# Altium PCB senkron_buck.PcbDoc (part 2 of 3)
Units mm, origin at the board's own origin, x right, y up, seen from the top; angles counter-clockwise.
Board outline 100 x 70 mm, 4 copper layers (Top Layer, L2_GND, L3_PWR, Bottom Layer), stack 1.586 mm thick; 52 components, 27 nets, 143 pads, 815 vias.
Unrouted connection lines stored in the file: 34.
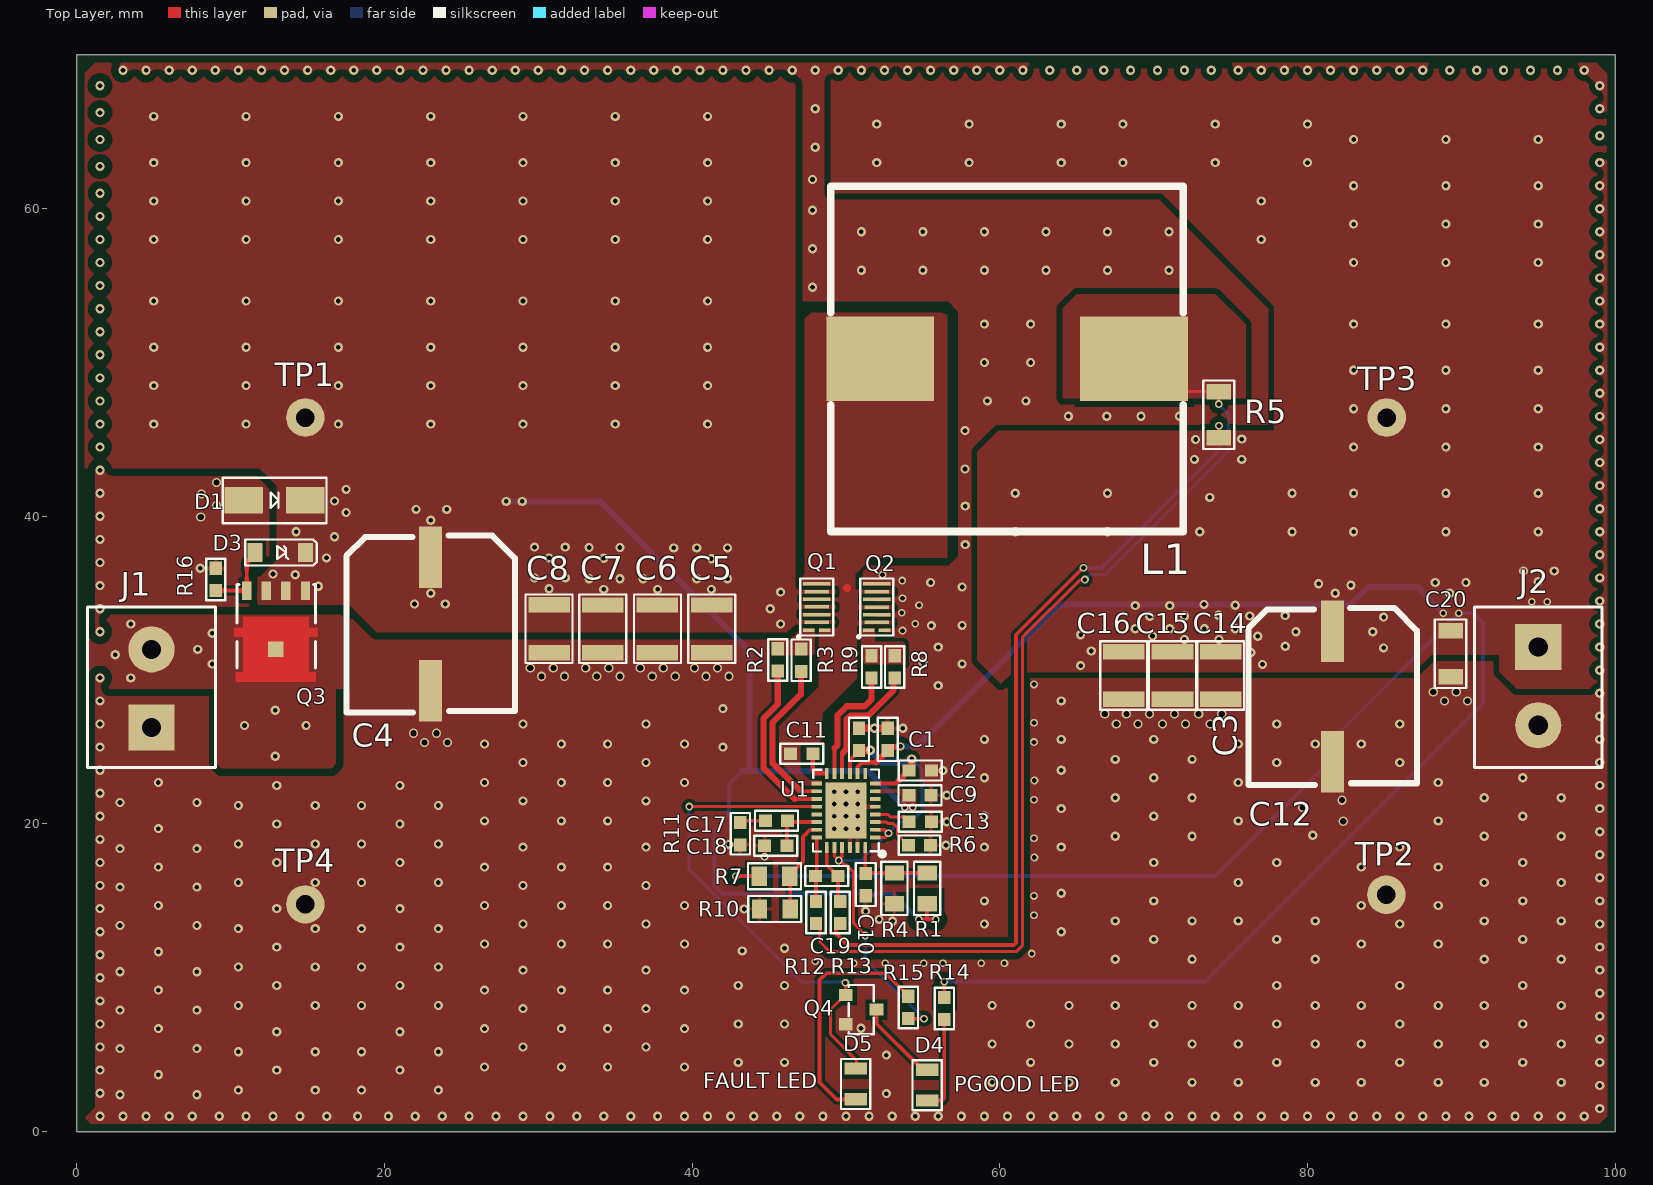
[diagram p0: Top Layer view]

## Part data (continued)
C20: library part "Cap Cer 10uF %10 SMD 1206 (25V)", "Ceramic Capacitor, Multilayer, Ceramic, 25V, 10% +Tol, 10% -Tol, X7R, +-15% TC, 10uF, Surface Mount, 1206 inch", Case Code (Metric)=3216, Case Code (Imperial)=1206, Dielectric=X7R, Dielectric Material=Ceramic, Manufacturer="Samsung Electro-Mechanics", Manufacturer Part Number=CL31B106KAHNNNE, Max Operating Temperature=125°C, Min Operating Temperature=-55°C, Supplier Part Number=187-CL31B106KAHNNNE, Tolerance=10%, Voltage=25V, Case/Package=1206, Category="Ceramic Capacitors", China RoHS=Compliant, ComponentLink1Description=https://datasheet.octopart.com:443/CL31B106KAHNNNE-Samsung-Electro-Mechanics-datasheet-182024324.pdf?src-supplier=IHS, ComponentLink1URL=https://datasheet.octopart.com:443/CL31B106KAHNNNE-Samsung-Electro-Mechanics-datasheet-182024324.pdf?src-supplier=IHS, ComponentLink2Description=https://datasheet.octopart.com:443/CL31B106KAHNNNE-Samsung-Electro-Mechanics-datasheet-136482614.pdf?src-supplier=Samsung+SCT, ComponentLink2URL=https://datasheet.octopart.com:443/CL31B106KAHNNNE-Samsung-Electro-Mechanics-datasheet-136482614.pdf?src-supplier=Samsung+SCT, ComponentLink3Description=https://datasheet.octopart.com:443/CL31B106KAHNNNE-Samsung-Electro-Mechanics-datasheet-11609088.pdf?src-supplier=Future+Electronics, ComponentLink3URL=https://datasheet.octopart.com:443/CL31B106KAHNNNE-Samsung-Electro-Mechanics-datasheet-11609088.pdf?src-supplier=Future+Electronics, ComponentLink4Description=https://datasheet.octopart.com:443/CL31B106KAHNNNE-Samsung-Electro-Mechanics-datasheet-149066873.pdf?src-supplier=Future+Electronics, ComponentLink4URL=https://datasheet.octopart.com:443/CL31B106KAHNNNE-Samsung-Electro-Mechanics-datasheet-149066873.pdf?src-supplier=Future+Electronics, ComponentLink5Description=https://datasheet.octopart.com:443/CL31B106KAHNNNE-Samsung-Electro-Mechanics-datasheet-116051334.pdf?src-supplier=Future+Electronics, ComponentLink5URL=https://datasheet.octopart.com:443/CL31B106KAHNNNE-Samsung-Electro-Mechanics-datasheet-116051334.pdf?src-supplier=Future+Electronics, ComponentLink6Description=https://datasheet.octopart.com:443/CL31B106KAHNNNE-Samsung-Electro-Mechanics-datasheet-81462475.pdf?src-supplier=Future+Electronics, ComponentLink6URL=https://datasheet.octopart.com:443/CL31B106KAHNNNE-Samsung-Electro-Mechanics-datasheet-81462475.pdf?src-supplier=Future+Electronics, ComponentLink7Description=https://datasheet.octopart.com:443/CL31B106KAHNNNE-Samsung-datasheet-42485257.pdf?src-supplier=Future+Electronics, ComponentLink7URL=https://datasheet.octopart.com:443/CL31B106KAHNNNE-Samsung-datasheet-42485257.pdf?src-supplier=Future+Electronics, ComponentLink8Description=https://datasheet.octopart.com/CL31B106KAHNNNE-Samsung-Electro-Mechanics-datasheet-8324245.pdf, ComponentLink8URL=https://datasheet.octopart.com/CL31B106KAHNNNE-Samsung-Electro-Mechanics-datasheet-8324245.pdf, ComponentLink9Description=https://datasheet.octopart.com/CL31B106KAHNNNE-Samsung-Electro-Mechanics-datasheet-97040617.pdf, ComponentLink9URL=https://datasheet.octopart.com/CL31B106KAHNNNE-Samsung-Electro-Mechanics-datasheet-97040617.pdf, ComponentLink10Description=https://datasheet.octopart.com/General-Multilayer-Ceramic-Capacitors-Samsung-datasheet-family-111.pdf, ComponentLink10URL=https://datasheet.octopart.com/General-Multilayer-Ceramic-Capacitors-Samsung-datasheet-family-111.pdf, ComponentLink11Description=https://datasheet.octopart.com:443/CL31B106KAHNNNE-Samsung-datasheet-59220082.pdf?src-supplier=TME, ComponentLink11URL=https://datasheet.octopart.com:443/CL31B106KAHNNNE-Samsung-datasheet-59220082.pdf?src-supplier=TME, ComponentLink12Description=http://sigma.octopart.com:80/rohs_certificate/General-Multilayer-Ceramic-Capacitors-Samsung-family-110.pdf?src-supplier=Compliance+Statements, ComponentLink12URL=http://sigma.octopart.com:80/rohs_certificate/General-Multilayer-Ceramic-Capacitors-Samsung-family-110.pdf?src-supplier=Compliance+Statements, ComponentLink13Description=http://sigma.octopart.com:80/rohs_statement/General-Multilayer-Ceramic-Capacitors-Samsung-family-132.pdf?src-supplier=Compliance+Statements, ComponentLink13URL=http://sigma.octopart.com:80/rohs_statement/General-Multilayer-Ceramic-Capacitors-Samsung-family-132.pdf?src-supplier=Compliance+Statements, ComponentLink14Description=http://sigma.octopart.com:80/reach_statement/General-Multilayer-Ceramic-Capacitors-Samsung-family-133.pdf?src-supplier=Compliance+Statements, ComponentLink14URL=http://sigma.octopart.com:80/reach_statement/General-Multilayer-Ceramic-Capacitors-Samsung-family-133.pdf?src-supplier=Compliance+Statements, ComponentLink15Description=Tedarikçi, ComponentLink15URL=https://www.ozdisan.com/p/smt-smd-ve-mlcc-kapasitorler-184/samsung-cl31b106kahnnne-35896, Depth=1.6mm, Height=1.8mm, Length=3.2mm, Lifecycle Status=Production, Material=Ceramic, Mounting Technology="Surface Mount", Number of Terminals=2, Pricing="1=0,1, 10=0,036, 50=0,036, 100=0,036, 1000=0,036, 10000=0,035 (USD)", Radiation Hardening=No, REACH SVHC=Yes, RoHS=Compliant, Schedule B="8532240020, 8532240020|8532240020|8532240020|8532240020|8532240020", Stock=482438, Supplier=Mouser, Thickness=1.8034mm, Voltage Rating=25V, Voltage Rating (DC)=25V, Width=1.6mm
D1: library part "DIODE TVS 400W 40V DO214AC SMA", "DO-214AC SMA SMAJ 1 Surface Mount Zener Tvs Diode 44.4V 5muA 400W -55C~150C TJ", Breakdown Voltage=46.75V, Case/Package=SMA, Clamping Voltage=64.5V, Forward Voltage=3.5V, Leakage Current=5µA, Manufacturer=HOTTECH, Max Breakdown Voltage=49.1V, Max Junction Temperature (Tj)=150°C, Max Power Dissipation=1W, Max Surge Current=40A, Min Breakdown Voltage=44.4V, Min Operating Temperature=-55°C, Peak Pulse Current=31A, Peak Pulse Power=400W, Power Line Protection=No, Reverse Standoff Voltage=40V, Supplier Part Number=652-SMAJ40A, Test Current=1mA, Category="TVS Diodes", China RoHS=Non-Compliant, ComponentLink1Description=https://datasheet.octopart.com:443/SMAJ40A-Bourns-datasheet-178218646.pdf?src-supplier=TME, ComponentLink1URL=https://datasheet.octopart.com:443/SMAJ40A-Bourns-datasheet-178218646.pdf?src-supplier=TME, ComponentLink2Description=https://datasheet.octopart.com:443/SMAJ40A-Bourns-datasheet-112042111.pdf?src-supplier=Newark, ComponentLink2URL=https://datasheet.octopart.com:443/SMAJ40A-Bourns-datasheet-112042111.pdf?src-supplier=Newark, ComponentLink3Description=https://datasheet.octopart.com:443/SMAJ40A-Bourns-datasheet-42429164.pdf?src-supplier=Newark, ComponentLink3URL=https://datasheet.octopart.com:443/SMAJ40A-Bourns-datasheet-42429164.pdf?src-supplier=Newark, ComponentLink4Description=https://datasheet.octopart.com:443/SMAJ40A-Bourns-datasheet-182247548.pdf?src-supplier=IHS, ComponentLink4URL=https://datasheet.octopart.com:443/SMAJ40A-Bourns-datasheet-182247548.pdf?src-supplier=IHS, ComponentLink5Description=https://datasheet.octopart.com:443/SMAJ40A-Bourns-datasheet-13385887.pdf?src-supplier=Electro+Sonic, ComponentLink5URL=https://datasheet.octopart.com:443/SMAJ40A-Bourns-datasheet-13385887.pdf?src-supplier=Electro+Sonic, ComponentLink6Description=https://datasheet.octopart.com:443/SMAJ40A-Bourns-datasheet-154729895.pdf?src-supplier=Electro+Sonic, ComponentLink6URL=https://datasheet.octopart.com:443/SMAJ40A-Bourns-datasheet-154729895.pdf?src-supplier=Electro+Sonic, ComponentLink7Description=https://datasheet.octopart.com:443/SMAJ40A-Bourns-datasheet-154729573.pdf?src-supplier=RS+(Formerly+Allied+Electronics), ComponentLink7URL=https://datasheet.octopart.com:443/SMAJ40A-Bourns-datasheet-154729573.pdf?src-supplier=RS+(Formerly+Allied+Electronics), ComponentLink8Description=https://datasheet.octopart.com:443/SMAJ40A-Bourns-datasheet-14047643.pdf?src-supplier=iiiC, ComponentLink8URL=https://datasheet.octopart.com:443/SMAJ40A-Bourns-datasheet-14047643.pdf?src-supplier=iiiC, ComponentLink9Description=http://sigma.octopart.com:80/conflict_mineral_statement/Bourns-company-36.pdf?src-supplier=Compliance+Statements, ComponentLink9URL=http://sigma.octopart.com:80/conflict_mineral_statement/Bourns-company-36.pdf?src-supplier=Compliance+Statements, ComponentLink10Description=Tedarikçi, ComponentLink10URL=https://www.ozdisan.com/p/tvs-diyotlar-386/hottech-smaj40a-ht-512674, Composition=Zener, Direction=Unidirectional, Element Configuration=Single, Height=2.29mm, Lifecycle Status=Production, Manufacturer Part Number=SMAJ40A-HT, Max Operating Temperature=150°C, Max Reverse Leakage Current=5µA, Mounting Technology="Surface Mount", Number of Channels=1, Number of Elements=1, Number of Terminals=2, Number of Unidirectional Channels=1, Operating Supply Voltage=3.5V, Peak Reverse Current=5µA, Pins=2, Polarity=Unidirectional, Pricing="1=0,37, 10=0,158, 50=0,158, 100=0,099, 1000=0,095, 10000=0,079 (USD)", Radiation Hardening=No, REACH SVHC=No, Reverse Breakdown Voltage=44.4V, RoHS=Compliant, Schedule B=8541100080, Stock=74885, Supplier=Mouser, Termination=SMD/SMT
D3: "DIODE ZENER 500mW 15V ±5% SOD123 SMT", Voltaj - Zener (Nom) (Vz)="15 V15 V", ComponentLink1Description=Tedarikçi, ComponentLink1URL=https://www.ozdisan.com/p/zener-diyotlar-390/hottech-mmsz15v-ht-465503, Güç (Max)=500mW, Kılıf / Kasa=SOD123, Montaj Tipi=SMT, Ters Akım="45 nA"
D4: library part "LED GREEN 0805", "Single Color LED, Brilliant Yellow Green, Water Clear, 1.4mm", Forward Current=25mA, Forward Voltage=2.35V, Manufacturer=Everlight, Manufacturer Part Number=17-21/G6C-FM1N2B/4T, Max Operating Temperature=85°C, Min Operating Temperature=-40°C, Reverse Voltage=5V, Supplier Part Number=2187640, Category=LEDs, ComponentLink1Description=https://datasheet.octopart.com:443/17-21-G6C-FM1N2B-4T-Everlight-datasheet-182278283.pdf?src-supplier=IHS, ComponentLink1URL=https://datasheet.octopart.com:443/17-21-G6C-FM1N2B-4T-Everlight-datasheet-182278283.pdf?src-supplier=IHS, ComponentLink2Description=Tedarikçi, ComponentLink2URL=https://www.ozdisan.com/p/sinyal-ledler-tek-renkli-361/everlight-17-21-g6c-fm1n2b-4t-745079, Height=1.1mm, Lifecycle Status=Production, Luminous Intensity=18mcd, Mounting Technology="Surface Mount", Number of Circuits=1, Number of Terminals=2, Peak Wavelength=575nm, Pricing="4000=0,0235, 12000=0,023, 20000=0,0227, 80000=0,0221, 120000=0,0216 (USD)", REACH SVHC=Yes, RoHS=Compliant, Shape=Rectangular, Supplier="Future Electronics", Terminal Pitch=1.6mm, Viewing Angle=140°
D5: library part "LED RED 0805", "Single Color LED, Brilliant Red, Water Clear, 1.4mm", Forward Current=25mA, Forward Voltage=2.3V, Manufacturer=Everlight, Manufacturer Part Number=17-21/R6C-AP1Q2L/4T, Max Operating Temperature=85°C, Min Operating Temperature=-40°C, Reverse Voltage=5V, Supplier Part Number=3156045, Category=LEDs, ComponentLink1Description=https://datasheet.octopart.com:443/17-21-R6C-AP1Q2L-4T-Everlight-datasheet-116384818.pdf?src-supplier=IHS, ComponentLink1URL=https://datasheet.octopart.com:443/17-21-R6C-AP1Q2L-4T-Everlight-datasheet-116384818.pdf?src-supplier=IHS, ComponentLink2Description=Tedarikçi, ComponentLink2URL=https://www.ozdisan.com/p/sinyal-ledler-tek-renkli-361/everlight-17-21-r6c-ap1q2l-4t-752951, Height=1mm, Lifecycle Status=Production, Luminous Intensity=45mcd, Mounting Technology="Surface Mount", Number of Circuits=1, Number of Terminals=2, Peak Wavelength=632nm, Pricing="4000=0,0312, 12000=0,0305, 20000=0,0301, 60000=0,0294, 100000=0,0288 (USD)", REACH SVHC=Yes, RoHS=Compliant, Shape=Rectangular, Supplier="Future Electronics", Viewing Angle=140°
J1 J2: library part "2P Screw Terminal Block", "Barrier Strip Terminal Block, 13.5A, 1.5mm2, 1 Row(s), 1 Deck(s)", Current Rating=13.5A, Manufacturer="Phoenix Contact", Manufacturer Part Number=1729128, Supplier Part Number=277-1247-ND, Voltage Rating=400V, Category="Terminal Blocks", ComponentLink1Description=https://datasheet.ciiva.com/16046/1729128-16046181.pdf?src-supplier=Onlinecomponents.com, ComponentLink1URL=https://datasheet.ciiva.com/16046/1729128-16046181.pdf?src-supplier=Onlinecomponents.com, ComponentLink2Description=https://datasheet.ciiva.com/15169/getdatasheetpartid-199310-15169845.pdf?src-supplier=Verical, ComponentLink2URL=https://datasheet.ciiva.com/15169/getdatasheetpartid-199310-15169845.pdf?src-supplier=Verical, ComponentLink3Description=https://datasheet.ciiva.com/823/1729128-823779.pdf?src-supplier=Digikey, ComponentLink3URL=https://datasheet.ciiva.com/823/1729128-823779.pdf?src-supplier=Digikey, ComponentLink4Description=https://datasheet.ciiva.com/14607/70054405-14607157.pdf?src-supplier=Allied+Electronics, ComponentLink4URL=https://datasheet.ciiva.com/14607/70054405-14607157.pdf?src-supplier=Allied+Electronics, ComponentLink5Description=https://datasheet.ciiva.com/29218/743664-da-01-en-printklemmenblock-mkdsn-1-5-2-5-08-29218154.pdf?src-supplier=Conrad, ComponentLink5URL=https://datasheet.ciiva.com/29218/743664-da-01-en-printklemmenblock-mkdsn-1-5-2-5-08-29218154.pdf?src-supplier=Conrad, ComponentLink6Description=https://datasheet.ciiva.com:443/pdfs/VipMasterIC/IC/ONST/ONST-S-A0002844216/ONST-S-A0002844216-1.pdf?src-supplier=IHS+Markit, ComponentLink6URL=https://datasheet.ciiva.com:443/pdfs/VipMasterIC/IC/ONST/ONST-S-A0002844216/ONST-S-A0002844216-1.pdf?src-supplier=IHS+Markit, ComponentLink7Description=https://datasheet.ciiva.com/825/osttcxx0162-825113.pdf?src-supplier=Digikey, ComponentLink7URL=https://datasheet.ciiva.com/825/osttcxx0162-825113.pdf?src-supplier=Digikey, ComponentLink8Description=https://datasheet.ciiva.com:443/pdfs/VipMasterIC/IC/PCON/PCON-S-A0008047989/PCON-S-A0008036843-1.pdf?src-supplier=IHS+Markit, ComponentLink8URL=https://datasheet.ciiva.com:443/pdfs/VipMasterIC/IC/PCON/PCON-S-A0008047989/PCON-S-A0008036843-1.pdf?src-supplier=IHS+Markit, Fastening Method=SCREW, Mounting Technology=Board, Number of Decks=1, Number of Rows=1, Number of Ways=2, Pricing="1=1,2, 10=1,104, 50=1,058, 100=1,012, 250=0,9844, 500=0,92, 1000=0,8464, 2500=0,782, 5000=0,7475 (USD)", Reach SVHC Compliant=No, RoHS=Yes, RoHS Compliant=Yes, Safety Approval=CSA,CUL,CB,EAC, Stock=25195, Supplier=Digikey, Terminal and Terminal Block Type="BARRIER STRIP TERMINAL BLOCK", Wire Cross Section=1.5mm2, Wire/Cable Gauge=16AWG
L1: library part "Inductor 10uH %20 SMD NONSTANDART 3.4mOhm", "WE-HCI SMT Flat Wire High Current Inductor", Ambient Temperature Range High=75°C, Ambient Temperature Range Low=-40°C, DC Resistance (DCR)=3.4mΩ, Manufacturer="Wurth Elektronik", Manufacturer Part Number=74435581000, Max Operating Temperature=125°C, Saturation Current=8A, Self Resonant Frequency=15MHz, Supplier Part Number=710-74435581000, Inductance Tolerance=20%, Category="Fixed Inductors", ComponentLink1Description=Tedarikçi, ComponentLink1URL=https://www.e-komponent.com/10-uh-shielded-drum-core-wirewound-inductor-74435581000, ComponentLink2Description=https://datasheet.octopart.com:443/74435581000-Wurth-Elektronik-datasheet-168489601.pdf?src-supplier=Wurth+Elektronik, ComponentLink2URL=https://datasheet.octopart.com:443/74435581000-Wurth-Elektronik-datasheet-168489601.pdf?src-supplier=Wurth+Elektronik, ComponentLink3Description=https://datasheet.octopart.com:443/74435581000-W%C3%BCrth-Elektronik-datasheet-141435431.pdf?src-supplier=Newark, ComponentLink3URL=https://datasheet.octopart.com:443/74435581000-W%C3%BCrth-Elektronik-datasheet-141435431.pdf?src-supplier=Newark, ComponentLink4Description=https://datasheet.octopart.com:443/74435581000-W%C3%BCrth-Elektronik-datasheet-12562517.pdf?src-supplier=Newark, ComponentLink4URL=https://datasheet.octopart.com:443/74435581000-W%C3%BCrth-Elektronik-datasheet-12562517.pdf?src-supplier=Newark, ComponentLink5Description=https://datasheet.octopart.com:443/74435581000-W%C3%BCrth-Elektronik-datasheet-112299786.pdf?src-supplier=Newark, ComponentLink5URL=https://datasheet.octopart.com:443/74435581000-W%C3%BCrth-Elektronik-datasheet-112299786.pdf?src-supplier=Newark, Height=12mm, Length=22.5mm, Min Operating Temperature=-40°C, Pins=2, Pricing="1=7,34, 10=7,2, 50=6,37, 100=6,37, 1000=4,99, 10000=4,99 (USD)", RoHS=Compliant, Stock=497, Supplier=Mouser, Width=22mm
Q1 Q2: "N-Channel 100 V 60A (Ta) Surface Mount Die", ComponentLink1Description=Tedarikçi, ComponentLink1URL=https://www.e-komponent.com/epc2218-epc-transistor-fet-mosfet-tekli, ComponentLink2Description=Datasheet, ComponentLink2URL=https://epc-co.com/epc/Portals/0/epc/documents/datasheets/EPC2218_datasheet.pdf?ver=C-R46UeqE-iEjg6gr7hUEg%3d%3d, Drain Source Gerilimi (Vdss)="100 V", FET Tipi=N-Channel, Maksimum Açık Drain Source direnci - (Maks) @ Id, Vgs="3.2mOhm @ 25A, 5V", Maksimum Gain Source Gerilimi="+6V, -4V", Maksimum Giriş Kapasitansı (Ciss) @ Vds="2703 pF @ 50 V", Maksimum Kapı Şarjı (Qg) @ Vgs="16.3 nC @ 5 V", Maksimum Sürüş Gerilimi=5V, Montaj Tipi="Surface Mount", Paket / Kılıf=Die, Sürekli Drain Akımı (Id) @ 25°C="60A (Ta)", Teknoloji="GaNFET (Gallium Nitride)", Vgs(th) (Maks) @ Id="2.5V @ 7mA", Çalışma Sıcaklığı="-40°C ~ 150°C (TJ)"
Q3: library part SQJ459EP-T1_GE3, "SQJ459EP Series -60 V 0.024 Ohm Automotive P-Channel Mosfet - PowerPAK SO-8L", Continuous Drain Current (ID)=52A, Drain to Source Breakdown Voltage=-60V, Drain to Source Resistance=18mΩ, Gate to Source Voltage (Vgs)=20V, Manufacturer=Vishay, Max Junction Temperature (Tj)=175°C, Min Breakdown Voltage=60V, Min Operating Temperature=-55°C, Power Dissipation=83W, Supplier Part Number=78-SQJ459EP-T1_GE3, Category=MOSFETs, ComponentLink1Description=https://datasheet.octopart.com:443/SQJ459EP-T1_GE3-Vishay-datasheet-181474805.pdf?src-supplier=IHS, ComponentLink1URL=https://datasheet.octopart.com:443/SQJ459EP-T1_GE3-Vishay-datasheet-181474805.pdf?src-supplier=IHS, ComponentLink2Description=https://datasheet.octopart.com:443/SQJ459EP-T1_GE3-Vishay-datasheet-138899039.pdf?src-supplier=Upverter, ComponentLink2URL=https://datasheet.octopart.com:443/SQJ459EP-T1_GE3-Vishay-datasheet-138899039.pdf?src-supplier=Upverter, ComponentLink3Description=https://datasheet.octopart.com:443/SQJ459EP-T1_GE3-Vishay-datasheet-137754848.pdf?src-supplier=Future+Electronics, ComponentLink3URL=https://datasheet.octopart.com:443/SQJ459EP-T1_GE3-Vishay-datasheet-137754848.pdf?src-supplier=Future+Electronics, ComponentLink4Description=http://sigma.octopart.com:80/rohs_statement/Vishay-company-15.pdf?src-supplier=Compliance+Statements, ComponentLink4URL=http://sigma.octopart.com:80/rohs_statement/Vishay-company-15.pdf?src-supplier=Compliance+Statements, Drain to Source Voltage (Vdss)=-60V, Height=1.267mm, Lifecycle Status=Production, Manufacturer Part Number=SQJ459EP-T1_GE3, Max Operating Temperature=175°C, Number of Channels=1, Number of Elements=1, Number of Terminals=4, Pricing="1=1,67, 10=1,26, 50=1,26, 100=0,864, 1000=0,633, 10000=0,526 (USD)", RoHS=Compliant, Schedule B="8541290080, 8541290080|8541290080|8541290080|8541290080|8541290080", Stock=10269, Supplier=Mouser, Turn-Off Delay Time=88ns, Turn-On Delay Time=12ns
Q4: "MOSFET DIS.6.5A 20V N-CH SOT23 SMT", Manufacturer="Pan Jit", Supplier Part Number=241-PJA3416AER100001, Category=MOSFETs, ComponentLink1Description=Datasheet, ComponentLink1URL=https://cdn.ozdisan.com/ETicaret_Dosya/601491_131509.pdf, ComponentLink2Description=Supplier, ComponentLink2URL=https://ozdisan.com/guc-yari-iletkenleri/mosfetler/discrete-mosfetler/PJA3416AER100001/601492, Designed by=Eren/Mehmet, Manufacturer Part Number=PJA3416AE_R1_00001, Pricing="1=0,29, 10=0,195, 50=0,195, 100=0,101, 1000=0,101, 10000=0,062 (USD)", RoHS=No, Stock=7147, Supplier=Mouser
R1: library part "RES 412k Ohm %1 SMD 0805", "RES.(2012) 0805 412K Ohms 1% 1/8W-S 100PPM", Manufacturer="Royal Ohm", Manufacturer Part Number=0805S8F4123T5E, Supplier Part Number=303-0805S8F4123T5E, Category=Uncategorized, ComponentLink1Description=Tedarikçi, ComponentLink1URL=https://www.ozdisan.com/p/smt-smd-ve-cip-direncler-194/royalohm-0805s8f4123t5e-505640, Pricing="10000=0,001 (USD)", Supplier=Mouser
R2: library part "RES 2.2R Ohm %1 SMD 0603_1", "RES.(1608) 0603 2.2 Ohms 1% 1/10W AUTOMOTIV", Manufacturer="Royal Ohm", Manufacturer Part Number=CQ03SAF220KT5E, Supplier Part Number=303-CQ03SAF220KT5E, Category=Uncategorized, ComponentLink1Description=Tedarikçi, ComponentLink1URL=https://www.ozdisan.com/p/smt-smd-ve-cip-direncler-194/royalohm-cq03saf220kt5e-587939, Pricing="10000=0,002 (USD)", Supplier=Mouser
R3 R8 R9: library part "RES 1R Ohm %1 SMD 0603", "RES.(1608) 0603 1 Ohms 1% 1/10W AUTOMOTIV", Manufacturer="Royal Ohm", Manufacturer Part Number=CQ03SAF100KT5E, Supplier Part Number=303-CQ03SAF100KT5E, Category=Uncategorized, ComponentLink1Description=Tedarikçi, ComponentLink1URL=https://www.ozdisan.com/p/smt-smd-ve-cip-direncler-194/royalohm-cq03saf100kt5e-587589, Pricing="10000=0,002 (USD)", Supplier=Mouser
R4: library part "RES 33.2k Ohm %1 SMD 0805", "RES.(2012) 0805 33.2K Ohms 1% 1/8W-S 100PPM", Manufacturer="Royal Ohm", Manufacturer Part Number=0805S8F3322T5E, Supplier Part Number=303-0805S8F3322T5E, Temperature Coefficient=100ppm/°C, Category=Uncategorized, ComponentLink1Description=https://datasheet.octopart.com:443/0805S8F3322T5E-Royal-Ohm-datasheet-165785611.pdf?src-supplier=TME, ComponentLink1URL=https://datasheet.octopart.com:443/0805S8F3322T5E-Royal-Ohm-datasheet-165785611.pdf?src-supplier=TME, ComponentLink2Description=https://datasheet.octopart.com:443/0805S8F3322T5E-Royal-Ohm-datasheet-157855877.pdf?src-supplier=TME, ComponentLink2URL=https://datasheet.octopart.com:443/0805S8F3322T5E-Royal-Ohm-datasheet-157855877.pdf?src-supplier=TME, ComponentLink3Description=https://datasheet.octopart.com:443/0805S8F3322T5E-Royal-Ohm-datasheet-62069544.pdf?src-supplier=TME, ComponentLink3URL=https://datasheet.octopart.com:443/0805S8F3322T5E-Royal-Ohm-datasheet-62069544.pdf?src-supplier=TME, ComponentLink4Description=Tedarikçi, ComponentLink4URL=https://www.ozdisan.com/p/smt-smd-ve-cip-direncler-194/royalohm-0805s8f3322t5e-505560, Pricing="10000=0,001 (USD)", Supplier=Mouser
R5: library part "RES 6m Ohm %1 SMD 1206", "RES.(3216) 1206 6m Ohms 1% 1W 50PPM", Tolerans="±1 %", ComponentLink1Description=Tedarikçi, ComponentLink1URL=https://www.ozdisan.com/p/smt-smd-ve-cip-direncler-194/royalohm-ml061wf600nt5e-740932, Direnç Değeri="6 m Ohms", Güç=1W, Kılıf / Kasa="1206 (3216 Metric)", Üretici Ürün Kodu=ML061WF600NT5E
R6: library part "RES 73.2k Ohm %1 SMD 0603", "RES.(1608) 0603 73.2K Ohms 1% 1/10W-S 100PPM", Manufacturer="Royal Ohm", Manufacturer Part Number=0603SAF7322T5E, Supplier Part Number=303-0603SAF7322T5E, Category=Uncategorized, ComponentLink1Description=Tedarikçi, ComponentLink1URL=https://www.ozdisan.com/p/smt-smd-ve-cip-direncler-194/royalohm-0603saf7322t5e-505956, Pricing="10000=0,001 (USD)", Supplier=Mouser
R7: library part "RES 604k Ohm %1 SMD 0805", "RES.(2012) 0805 604K Ohms 1% 1/8W-S 100PPM", Manufacturer="Royal Ohm", Manufacturer Part Number=0805S8F6043T5E, Supplier Part Number=303-0805S8F6043T5E, Category=Uncategorized, ComponentLink1Description=Tedarikçi, ComponentLink1URL=https://www.ozdisan.com/p/smt-smd-ve-cip-direncler-194/royalohm-0805s8f6043t5e-505655, Pricing="10000=0,001 (USD)", Supplier=Mouser
R10: library part "RES 43.2k Ohm %1 SMD 0805", "RES.(2012) 0805 43.2K Ohms 1% 1/8W-S 100PPM", Manufacturer="Royal Ohm", Manufacturer Part Number=0805S8F4322T5E, Supplier Part Number=303-0805S8F4322T5E, Temperature Coefficient=100ppm/°C, Category=Uncategorized, ComponentLink1Description=https://datasheet.octopart.com:443/0805S8F4322T5E-Royal-Ohm-datasheet-165785611.pdf?src-supplier=TME, ComponentLink1URL=https://datasheet.octopart.com:443/0805S8F4322T5E-Royal-Ohm-datasheet-165785611.pdf?src-supplier=TME, ComponentLink2Description=https://datasheet.octopart.com:443/0805S8F4322T5E-Royal-Ohm-datasheet-157855877.pdf?src-supplier=TME, ComponentLink2URL=https://datasheet.octopart.com:443/0805S8F4322T5E-Royal-Ohm-datasheet-157855877.pdf?src-supplier=TME, ComponentLink3Description=https://datasheet.octopart.com:443/0805S8F4322T5E-Royal-Ohm-datasheet-62069544.pdf?src-supplier=TME, ComponentLink3URL=https://datasheet.octopart.com:443/0805S8F4322T5E-Royal-Ohm-datasheet-62069544.pdf?src-supplier=TME, ComponentLink4Description=Tedarikçi, ComponentLink4URL=https://www.ozdisan.com/p/smt-smd-ve-cip-direncler-194/royalohm-0805s8f4322t5e-505567, Pricing="10000=0,001 (USD)", Supplier=Mouser
R11: library part "RES 10kOhm %1 SMD 0603", "100mW Thick Film Resistors ±100ppm/℃ ±1% 10kΩ 0603 Chip Resistor - Surface Mount ROHS", Case Code (Metric)=0603, Manufacturer="Yageo Group", Manufacturer Part Number=RC0603FR-0710KL, Max Operating Temperature=155°C, Min Operating Temperature=-55°C, Power Dissipation=100mW, Supplier Part Number=603-RC0603FR-0710KL, Temperature Coefficient=100ppm/°C, Tolerance=1%, Voltage Rating=75V, Voltage Rating (DC)=50V, Case Code (Imperial)=0603, Case/Package=0603, Category="Chip SMD Resistors", China RoHS=Non-Compliant, ComponentLink1Description=https://datasheet.octopart.com:443/RC0603FR-0710KL-Yageo-datasheet-175887523.pdf?src-supplier=IHS, ComponentLink1URL=https://datasheet.octopart.com:443/RC0603FR-0710KL-Yageo-datasheet-175887523.pdf?src-supplier=IHS, ComponentLink2Description=https://datasheet.octopart.com:443/RC0603FR-0710KL-Yageo-datasheet-103092701.pdf?src-supplier=Upverter, ComponentLink2URL=https://datasheet.octopart.com:443/RC0603FR-0710KL-Yageo-datasheet-103092701.pdf?src-supplier=Upverter, ComponentLink3Description=https://datasheet.octopart.com:443/RC0603FR-0710KL-Yageo-datasheet-98239111.pdf?src-supplier=Upverter, ComponentLink3URL=https://datasheet.octopart.com:443/RC0603FR-0710KL-Yageo-datasheet-98239111.pdf?src-supplier=Upverter, ComponentLink4Description=https://datasheet.octopart.com:443/RC0603FR-0710KL-Yageo-datasheet-141265859.pdf?src-supplier=Upverter, ComponentLink4URL=https://datasheet.octopart.com:443/RC0603FR-0710KL-Yageo-datasheet-141265859.pdf?src-supplier=Upverter, ComponentLink5Description=https://sigma.octopart.com:443/138820526/technical_drawing/Yageo-RC0603FR-0710KL.pdf?src-supplier=Upverter, ComponentLink5URL=https://sigma.octopart.com:443/138820526/technical_drawing/Yageo-RC0603FR-0710KL.pdf?src-supplier=Upverter, ComponentLink6Description=https://datasheet.octopart.com:443/RC0603FR-0710KL-Yageo-datasheet-8328172.pdf?src-supplier=Farnell, ComponentLink6URL=https://datasheet.octopart.com:443/RC0603FR-0710KL-Yageo-datasheet-8328172.pdf?src-supplier=Farnell, ComponentLink7Description=https://datasheet.octopart.com:443/RC0603FR-0710KL-Yageo-datasheet-13691069.pdf?src-supplier=Farnell, ComponentLink7URL=https://datasheet.octopart.com:443/RC0603FR-0710KL-Yageo-datasheet-13691069.pdf?src-supplier=Farnell, ComponentLink8Description=https://datasheet.octopart.com:443/RC0603FR-0710KL-Yageo-datasheet-62067350.pdf?src-supplier=element14+APAC, ComponentLink8URL=https://datasheet.octopart.com:443/RC0603FR-0710KL-Yageo-datasheet-62067350.pdf?src-supplier=element14+APAC, ComponentLink9Description=https://datasheet.octopart.com:443/RC0603FR-0710KL-Yageo-datasheet-17842380.pdf?src-supplier=element14+APAC, ComponentLink9URL=https://datasheet.octopart.com:443/RC0603FR-0710KL-Yageo-datasheet-17842380.pdf?src-supplier=element14+APAC, ComponentLink10Description=https://datasheet.octopart.com:443/RC0603FR-0710KL-Yageo-datasheet-15599030.pdf?src-supplier=Future+Electronics, ComponentLink10URL=https://datasheet.octopart.com:443/RC0603FR-0710KL-Yageo-datasheet-15599030.pdf?src-supplier=Future+Electronics, ComponentLink11Description=https://datasheet.octopart.com:443/RC0603FR-0710KL-Yageo-datasheet-164759695.pdf?src-supplier=Future+Electronics, ComponentLink11URL=https://datasheet.octopart.com:443/RC0603FR-0710KL-Yageo-datasheet-164759695.pdf?src-supplier=Future+Electronics, ComponentLink12Description=https://datasheet.octopart.com:443/RC0603FR-0710KL-Yageo-datasheet-127823281.pdf?src-supplier=Future+Electronics, ComponentLink12URL=https://datasheet.octopart.com:443/RC0603FR-0710KL-Yageo-datasheet-127823281.pdf?src-supplier=Future+Electronics, ComponentLink13Description=https://datasheet.octopart.com:443/RC0603FR-0710KL-Yageo-datasheet-137700087.pdf?src-supplier=Future+Electronics, ComponentLink13URL=https://datasheet.octopart.com:443/RC0603FR-0710KL-Yageo-datasheet-137700087.pdf?src-supplier=Future+Electronics, ComponentLink14Description=https://datasheet.octopart.com:443/RC0603FR-0710KL-Yageo-datasheet-27584510.pdf?src-supplier=Future+Electronics, ComponentLink14URL=https://datasheet.octopart.com:443/RC0603FR-0710KL-Yageo-datasheet-27584510.pdf?src-supplier=Future+Electronics, ComponentLink15Description=https://datasheet.octopart.com:443/RC0603FR-0710KL-Yageo-datasheet-8324193.pdf?src-supplier=Future+Electronics, ComponentLink15URL=https://datasheet.octopart.com:443/RC0603FR-0710KL-Yageo-datasheet-8324193.pdf?src-supplier=Future+Electronics, ComponentLink16Description=https://datasheet.octopart.com:443/RC0603FR-0710KL-Yageo-datasheet-12596169.pdf?src-supplier=Newark, ComponentLink16URL=https://datasheet.octopart.com:443/RC0603FR-0710KL-Yageo-datasheet-12596169.pdf?src-supplier=Newark, ComponentLink17Description=https://datasheet.octopart.com:443/RC0603FR-0710KL-Yageo-datasheet-503470.pdf?src-supplier=Newark, ComponentLink17URL=https://datasheet.octopart.com:443/RC0603FR-0710KL-Yageo-datasheet-503470.pdf?src-supplier=Newark, ComponentLink18Description=https://datasheet.octopart.com:443/RC0603FR-0710KL-Yageo-datasheet-34211833.pdf?src-supplier=Newark, ComponentLink18URL=https://datasheet.octopart.com:443/RC0603FR-0710KL-Yageo-datasheet-34211833.pdf?src-supplier=Newark, ComponentLink19Description=https://datasheet.octopart.com:443/RC0603FR-0710KL-Yageo-datasheet-79472498.pdf?src-supplier=Megastar, ComponentLink19URL=https://datasheet.octopart.com:443/RC0603FR-0710KL-Yageo-datasheet-79472498.pdf?src-supplier=Megastar, ComponentLink20Description=https://datasheet.octopart.com/RC0603FR-0710KL-Yageo-datasheet-73766026.pdf, ComponentLink20URL=https://datasheet.octopart.com/RC0603FR-0710KL-Yageo-datasheet-73766026.pdf, ComponentLink21Description=https://datasheet.octopart.com:443/RC0603FR-0710KL-Yageo-datasheet-118562.pdf?src-supplier=DigiKey, ComponentLink21URL=https://datasheet.octopart.com:443/RC0603FR-0710KL-Yageo-datasheet-118562.pdf?src-supplier=DigiKey, ComponentLink22Description=http://sigma.octopart.com:80/rohs_statement/Yageo-company-2.pdf?src-supplier=Compliance+Statements, ComponentLink22URL=http://sigma.octopart.com:80/rohs_statement/Yageo-company-2.pdf?src-supplier=Compliance+Statements, ComponentLink23Description=http://sigma.octopart.com:80/conflict_mineral_statement/Yageo-company-3.pdf?src-supplier=Compliance+Statements, ComponentLink23URL=http://sigma.octopart.com:80/conflict_mineral_statement/Yageo-company-3.pdf?src-supplier=Compliance+Statements, ComponentLink24Description=Tedarikçi, ComponentLink24URL=https://www.ozdisan.com/p/smt-smd-ve-cip-direncler-194/yageo-rc0603fr-0710kl-379294, Composition="Thick Film", Depth=800µm, Height=450µm, Lead Free="Lead Free", Lead Pitch=300µm, Length=1.6mm, Lifecycle Status=Production, Military Standard=Not, Mounting Technology="Surface Mount", Number of Terminals=2, Packaging="Tape & Reel", Pins=2, Power Rating=100mW, Pricing="1=0,1, 10=0,006, 50=0,006, 100=0,006, 1000=0,006, 10000=0,002 (USD)", REACH SVHC=Yes, RoHS=Compliant, Schedule B="8533210045, 8533210045|8533210045|8533210045|8533210045|8533210045|8533210045|8533210045|8533210045|8533210045|8533210045|8533210045|8533210045|8533210045|8533210045|8533210045|8533210045|8533210045|8533210045|8533210045|8533210045|8533210045|8533210045|8533210045|85", Stock=6497070, Supplier=Mouser, Termination=SMD/SMT, Weight=2.012816mg, Width=800µm, Working Voltage=75V
R12 R13: library part "RES 47R Ohm %1 SMD 0603", "RES.(1608) 0603 47 Ohms 1% 1/10W AUTOMOTIV", Manufacturer="Royal Ohm", Manufacturer Part Number=CQ03SAF470JT5E, Supplier Part Number=303-CQ03SAF470JT5E, Category=Uncategorized, ComponentLink1Description=https://datasheet.octopart.com:443/CQ03SAF470JT5E-Royal-Ohm-datasheet-159080023.pdf?src-supplier=TME, ComponentLink1URL=https://datasheet.octopart.com:443/CQ03SAF470JT5E-Royal-Ohm-datasheet-159080023.pdf?src-supplier=TME, ComponentLink2Description=https://datasheet.octopart.com:443/CQ03SAF470JT5E-Royal-Ohm-datasheet-140586692.pdf?src-supplier=TME, ComponentLink2URL=https://datasheet.octopart.com:443/CQ03SAF470JT5E-Royal-Ohm-datasheet-140586692.pdf?src-supplier=TME, ComponentLink3Description=Tedarikçi, ComponentLink3URL=https://www.ozdisan.com/p/smt-smd-ve-cip-direncler-194/royalohm-cq03saf470jt5e-587944, Pricing="10000=0,001 (USD)", Supplier=Mouser
R14: library part "RES 2.2k Ohm %1 SMD 0603", "Res Thick Film 0603 2.2K Ohm 1% 0.1W(1/10W) +/-100ppm/C Epoxy Pad SMD T/R", Case Code (Metric)=0603, Manufacturer="Yageo Group", Manufacturer Part Number=RC0603FR-072K2L, Max Operating Temperature=155°C, Max Power Dissipation=100mW, Min Operating Temperature=-55°C, Supplier Part Number=603-RC0603FR-072K2L, Temperature Coefficient=100ppm/°C, Tolerance=1%, Voltage Rating=75V, Voltage Rating (DC)=50V, Case Code (Imperial)=0603, Case/Package=0603, Category="Chip SMD Resistors", China RoHS=Non-Compliant, ComponentLink1Description=https://datasheet.octopart.com:443/RC0603FR-072K2L-Yageo-datasheet-175887523.pdf?src-supplier=IHS, ComponentLink1URL=https://datasheet.octopart.com:443/RC0603FR-072K2L-Yageo-datasheet-175887523.pdf?src-supplier=IHS, ComponentLink2Description=https://datasheet.octopart.com:443/RC0603FR-072K2L-Yageo-datasheet-103092701.pdf?src-supplier=Upverter, ComponentLink2URL=https://datasheet.octopart.com:443/RC0603FR-072K2L-Yageo-datasheet-103092701.pdf?src-supplier=Upverter, ComponentLink3Description=https://datasheet.octopart.com:443/RC0603FR-072K2L-Yageo-datasheet-8328172.pdf?src-supplier=Newark, ComponentLink3URL=https://datasheet.octopart.com:443/RC0603FR-072K2L-Yageo-datasheet-8328172.pdf?src-supplier=Newark, ComponentLink4Description=https://datasheet.octopart.com:443/RC0603FR-072K2L-Yageo-datasheet-12596169.pdf?src-supplier=Newark, ComponentLink4URL=https://datasheet.octopart.com:443/RC0603FR-072K2L-Yageo-datasheet-12596169.pdf?src-supplier=Newark, ComponentLink5Description=https://datasheet.octopart.com:443/RC0603FR-072K2L-Yageo-datasheet-13691069.pdf?src-supplier=Newark, ComponentLink5URL=https://datasheet.octopart.com:443/RC0603FR-072K2L-Yageo-datasheet-13691069.pdf?src-supplier=Newark, ComponentLink6Description=https://datasheet.octopart.com:443/RC0603FR-072K2L-Yageo-datasheet-34211833.pdf?src-supplier=element14+APAC, ComponentLink6URL=https://datasheet.octopart.com:443/RC0603FR-072K2L-Yageo-datasheet-34211833.pdf?src-supplier=element14+APAC, ComponentLink7Description=https://datasheet.octopart.com:443/RC0603FR-072K2L-Yageo-datasheet-62067350.pdf?src-supplier=element14+APAC, ComponentLink7URL=https://datasheet.octopart.com:443/RC0603FR-072K2L-Yageo-datasheet-62067350.pdf?src-supplier=element14+APAC, ComponentLink8Description=https://datasheet.octopart.com:443/RC0603FR-072K2L-Yageo-datasheet-17842380.pdf?src-supplier=element14+APAC, ComponentLink8URL=https://datasheet.octopart.com:443/RC0603FR-072K2L-Yageo-datasheet-17842380.pdf?src-supplier=element14+APAC, ComponentLink9Description=https://datasheet.octopart.com:443/RC0603FR-072K2L-Yageo-datasheet-21426514.pdf?src-supplier=element14+APAC, ComponentLink9URL=https://datasheet.octopart.com:443/RC0603FR-072K2L-Yageo-datasheet-21426514.pdf?src-supplier=element14+APAC, ComponentLink10Description=https://datasheet.octopart.com:443/RC0603FR-072K2L-Yageo-datasheet-164759695.pdf?src-supplier=Future+Electronics, ComponentLink10URL=https://datasheet.octopart.com:443/RC0603FR-072K2L-Yageo-datasheet-164759695.pdf?src-supplier=Future+Electronics, ComponentLink11Description=https://datasheet.octopart.com:443/RC0603FR-072K2L-Yageo-datasheet-137700087.pdf?src-supplier=Future+Electronics, ComponentLink11URL=https://datasheet.octopart.com:443/RC0603FR-072K2L-Yageo-datasheet-137700087.pdf?src-supplier=Future+Electronics, ComponentLink12Description=https://datasheet.octopart.com:443/RC0603FR-072K2L-Yageo-datasheet-27584510.pdf?src-supplier=Future+Electronics, ComponentLink12URL=https://datasheet.octopart.com:443/RC0603FR-072K2L-Yageo-datasheet-27584510.pdf?src-supplier=Future+Electronics, ComponentLink13Description=https://datasheet.octopart.com:443/RC0603FR-072K2L-Yageo-datasheet-15599030.pdf?src-supplier=Future+Electronics, ComponentLink13URL=https://datasheet.octopart.com:443/RC0603FR-072K2L-Yageo-datasheet-15599030.pdf?src-supplier=Future+Electronics, ComponentLink14Description=https://datasheet.octopart.com:443/RC0603FR-072K2L-Yageo-datasheet-8324193.pdf?src-supplier=Future+Electronics, ComponentLink14URL=https://datasheet.octopart.com:443/RC0603FR-072K2L-Yageo-datasheet-8324193.pdf?src-supplier=Future+Electronics, ComponentLink15Description=https://datasheet.octopart.com:443/RC0603FR-072K2L-Yageo-datasheet-79472498.pdf?src-supplier=Megastar, ComponentLink15URL=https://datasheet.octopart.com:443/RC0603FR-072K2L-Yageo-datasheet-79472498.pdf?src-supplier=Megastar, ComponentLink16Description=https://datasheet.octopart.com/RC0603FR-072K2L-Yageo-datasheet-73766026.pdf, ComponentLink16URL=https://datasheet.octopart.com/RC0603FR-072K2L-Yageo-datasheet-73766026.pdf, ComponentLink17Description=https://datasheet.octopart.com:443/RC0603FR-072K2L-Yageo-datasheet-118562.pdf?src-supplier=DigiKey, ComponentLink17URL=https://datasheet.octopart.com:443/RC0603FR-072K2L-Yageo-datasheet-118562.pdf?src-supplier=DigiKey, ComponentLink18Description=https://datasheet.octopart.com:443/RC0603FR-072K2L-Yageo-datasheet-499455.pdf?src-supplier=element14, ComponentLink18URL=https://datasheet.octopart.com:443/RC0603FR-072K2L-Yageo-datasheet-499455.pdf?src-supplier=element14, ComponentLink19Description=http://sigma.octopart.com:80/conflict_mineral_statement/Yageo-company-3.pdf?src-supplier=Compliance+Statements, ComponentLink19URL=http://sigma.octopart.com:80/conflict_mineral_statement/Yageo-company-3.pdf?src-supplier=Compliance+Statements, ComponentLink20Description=http://sigma.octopart.com:80/rohs_statement/Yageo-company-2.pdf?src-supplier=Compliance+Statements, ComponentLink20URL=http://sigma.octopart.com:80/rohs_statement/Yageo-company-2.pdf?src-supplier=Compliance+Statements, Composition="Thick Film", Depth=800µm, Features="Moisture Resistant", Height=450µm, Lead Free="Lead Free", Length=1.6mm, Lifecycle Status=Production, Military Standard=Not, Mounting Technology="Surface Mount", Number of Terminals=2, Number of Terminations=2, Packaging="Tape & Reel", Pins=2, Power Dissipation=100mW, Power Rating=100mW, Pricing="1=0,1, 10=0,007, 50=0,007, 100=0,006, 1000=0,006, 10000=0,002 (USD)", REACH SVHC=Yes, RoHS=Compliant, Schedule B="8533210045, 8533210045|8533210045|8533210045|8533210045|8533210045|8533210045|8533210045|8533210045|8533210045|8533210045|8533210045|8533210045|8533210045|8533210045|8533210045, 8533210045|8533210045|8533210045|8533210045|8533210045|8533210045|8533210045|8533210045|8533210045|8533210045|8533210045|8533210045|8533210045|8533210045|8533210045|8533210045, 8533210045|8533210045|8533210045|8533210045|8533210045|8533210045|8533210045|8533210045|8533210045|8533210045|8533210045|8533210045|8533210045|8533210045|8533210045|8533210045|8533210045", Stock=1388232, Supplier=Mouser, Termination=SMD/SMT, Width=800µm, Working Voltage=75V
R15: library part "RES 1kOhm %5 SMD 0603", "(RC0603JR-071KL) SMD Chip Resistor, 1 kOhm, ï¿½ 5%, 100 mW, 0603 [1608 Metric], Thick Film, General Purpose", Case Code (Metric)=1608, Case Code (Imperial)=0603, Manufacturer=Yageo, Manufacturer Part Number=RC0603JR-071KL, Max Operating Temperature=155°C, Max Power Dissipation=100mW, Min Operating Temperature=-55°C, Package Quantity=5000, Resistance Tolerance=5%, Resistor Type="Thick Film", Supplier Part Number=603-RC0603JR-071KL, Temperature Coefficient=100ppm/°C, Voltage Rating=50V, Body Length=1.6mm, Case/Package=0603, Category="Chip SMD Resistors", ComponentLink1Description=https://ozdisan.com/pasif-komponentler/direncler/smt-smd-ve-cip-direncler/RC0603JR-071KL/534826, ComponentLink1URL=https://ozdisan.com/pasif-komponentler/direncler/smt-smd-ve-cip-direncler/RC0603JR-071KL/534826, Construction=Rectangular, Contact Plating=Tin,Matte, Depth=0.8mm, Designed by=Eren/Mehmet, Height=0.45mm, Lead Free=5697LeadFree, Length=1.6mm, Military Standard=Not, Number of Terminations=2, Packaging="Tape and Reel", Pins=2, Power Rating=100mW, Pricing="1=0,1, 10=0,01, 50=0,01, 100=0,006, 1000=0,005, 10000=0,002 (USD)", Reach SVHC Compliant=No, RoHS=Yes, RoHS Compliant=Yes, Series=RC, Stock=1707256, Supplier=Mouser, Termination=SMD/SMT, Tolerance=5%, Voltage Rating (AC)=50V, Voltage Rating (DC)=50V, Width=0.8mm
R16: library part "RES 100kOhm %5 SMD 0603", "(RC0603JR-07100KL) SMD Chip Resistor, 100 kOhm, ï¿½ 5%, 100 mW, 0603 [1608 Metric], Thick Film, General Purpose", Case Code (Metric)=1608, Case Code (Imperial)=0603, Manufacturer=Yageo, Manufacturer Part Number=RC0603JR-07100KL, Max Operating Temperature=155°C, Max Power Dissipation=100mW, Min Operating Temperature=-55°C, Resistance Tolerance=5%, Resistor Type="Thick Film", Supplier Part Number=603-RC0603JR-07100KL, Temperature Coefficient=100ppm/°C, Voltage Rating=50V, Case/Package=0603, Category="Chip SMD Resistors", ComponentLink1Description=https://datasheet.ciiva.com/7983/443971-7983686.pdf?src-supplier=Element14, ComponentLink1URL=https://datasheet.ciiva.com/7983/443971-7983686.pdf?src-supplier=Element14, ComponentLink2Description=https://datasheet.ciiva.com/7746/443971-7746423.pdf?src-supplier=Element14, ComponentLink2URL=https://datasheet.ciiva.com/7746/443971-7746423.pdf?src-supplier=Element14, ComponentLink3Description=https://datasheet.ciiva.com/7746/443971-7746424.pdf?src-supplier=Element14, ComponentLink3URL=https://datasheet.ciiva.com/7746/443971-7746424.pdf?src-supplier=Element14, ComponentLink4Description=https://datasheet.ciiva.com/8887/pyu-rc0603-51-rohs-l-4-8887903.pdf?src-supplier=Avnet, ComponentLink4URL=https://datasheet.ciiva.com/8887/pyu-rc0603-51-rohs-l-4-8887903.pdf?src-supplier=Avnet, ComponentLink5Description=https://ozdisan.com/pasif-komponentler/direncler/smt-smd-ve-cip-direncler/RC0603JR-07100KL/497416, ComponentLink5URL=https://ozdisan.com/pasif-komponentler/direncler/smt-smd-ve-cip-direncler/RC0603JR-07100KL/497416, ComponentLink6Description=Tedarikçi, ComponentLink6URL=https://www.ozdisan.com/p/SMT-SMD-and-Chip-Resistors-194/yageo-rc0603jr-07100kl-497416?srsltid=AfmBOorkxe1J5LG9tzeIkCUFacfrAbR8J3UYSLnWwXJC08_67mC0uBNS, Contact Plating=Tin,Matte, Designed by=Eren/Mehmet, Features="Moisture Resistant", Lead Free="Lead Free", Number of Terminations=2, Packaging="Tape and Reel", Pins=2, Power Rating=100mW, Pricing="1=0,11, 10=0,012, 50=0,012, 100=0,007, 1000=0,006, 10000=0,003 (USD)", Reach SVHC Compliant=No, RoHS=Yes, RoHS Compliant=Yes, Series=RC, Stock=474748, Supplier=Mouser, Termination=SMD/SMT, Tolerance=5%, Voltage Rating (AC)=50V, Voltage Rating (DC)=50V, Width=0.8mm
TP1 TP2 TP3 TP4: library part "Test Point THT", "PC TEST POINT MINIATURE BLACK 2.54MMX4.60MM", ComponentLink1Description=Tedarikçi, ComponentLink1URL=https://www.ozdisan.com/p/pc-test-pointler-ve-minyaturleri-817/kls-electronic-l-kls8-tp5001-600171, Üretici Ürün Kodu=L-KLS8-TP5001
U1: "DC/DC Cntrlr Single-OUT Step Down 3000kHz 28-Pin QFN EP Tube", Manufacturer="Analog Devices", Manufacturer Lifecycle Status=PRODUCTION, Manufacturer Part Number=LTC7891RUFDM#PBF, Supplier Part Number=584-LTC7891RUFDM#PBF, Category="Integrated Circuits (ICs)", ComponentLink1Description=https://octopart.com:443/opatz8j6/c1?t=snJM-oqN4i5KXPf6ZxMSfJVmx5b3prQWZ1YKz55cdHAOssj69pUbq11y53jpNXLgDVTeVKh_vwiLev8R1iru9bPJp5JOpg9ew8c0B_bF-2YS9pTF3lgdNCKLFOCgo8Jn88ITyMWCmfrsakpbqVU-I1ivKY6ErxFGVx1GYBHLSensFupXT_FEQbv8rA2HkJZsYVbMh4WIG1CiBe5uoJ2eYwlHtRwQ-G-jIMChA-Aes9CE4uijDouR14g7-RwL4TDZrL2pCbdODDuimWYBWXHKqWkdIqanOPgu0UqdY264VTFYN6dtggArAJFY&src-supplier=Analog+Devices, ComponentLink1URL=https://octopart.com:443/opatz8j6/c1?t=snJM-oqN4i5KXPf6ZxMSfJVmx5b3prQWZ1YKz55cdHAOssj69pUbq11y53jpNXLgDVTeVKh_vwiLev8R1iru9bPJp5JOpg9ew8c0B_bF-2YS9pTF3lgdNCKLFOCgo8Jn88ITyMWCmfrsakpbqVU-I1ivKY6ErxFGVx1GYBHLSensFupXT_FEQbv8rA2HkJZsYVbMh4WIG1CiBe5uoJ2eYwlHtRwQ-G-jIMChA-Aes9CE4uijDouR14g7-RwL4TDZrL2pCbdODDuimWYBWXHKqWkdIqanOPgu0UqdY264VTFYN6dtggArAJFY&src-supplier=Analog+Devices, ComponentLink2Description=http://sigma.octopart.com:80/conflict_mineral_statement/Analog-Devices-company-33.pdf?src-supplier=Compliance+Statements, ComponentLink2URL=http://sigma.octopart.com:80/conflict_mineral_statement/Analog-Devices-company-33.pdf?src-supplier=Compliance+Statements, ComponentLink3Description=https://octopart.com:443/opatz8j6/c1?t=32ejukEi-HqHMGLwiRUrzAhWInM7hLec0v3ZO_WhOusfdH2Ui30HbHPrJcj8IvmQ7-lmTl5cYuZ4wtlVXzDVOAsjS9GVlgbgkqQ7P_FRkKOFVSjhwX5JmXoixYW2PdtwNDxpFfSC9joKpYxz9bdg26IoAKrbBQqS80qjTXeR4e7Yh5rkoZML1v9jBX_dn3vNQhnPUKjdp5LTYfhfKnQeBuYeR3Vl4kDkg2hCSb_e8QlaRBQ1S8NnWgMOPzdZPMAPPDkY_VUKaJzOt8Np22GOFLMnycaTHELw0jLblQXPWjWEkvFlSDVgwzmJ&src-supplier=Compliance+Statements, ComponentLink3URL=https://octopart.com:443/opatz8j6/c1?t=32ejukEi-HqHMGLwiRUrzAhWInM7hLec0v3ZO_WhOusfdH2Ui30HbHPrJcj8IvmQ7-lmTl5cYuZ4wtlVXzDVOAsjS9GVlgbgkqQ7P_FRkKOFVSjhwX5JmXoixYW2PdtwNDxpFfSC9joKpYxz9bdg26IoAKrbBQqS80qjTXeR4e7Yh5rkoZML1v9jBX_dn3vNQhnPUKjdp5LTYfhfKnQeBuYeR3Vl4kDkg2hCSb_e8QlaRBQ1S8NnWgMOPzdZPMAPPDkY_VUKaJzOt8Np22GOFLMnycaTHELw0jLblQXPWjWEkvFlSDVgwzmJ&src-supplier=Compliance+Statements, ComponentLink4Description=Tedarikçi, ComponentLink4URL=https://www.digikey.com/en/products/detail/analog-devices-inc/LTC7891RUFDM-TRPBF/16187359, Lifecycle Status=Production, Number of Outputs=1, Pins=28, Pricing="1=7,68, 10=5,88, 50=5,48, 100=4,82, 1000=4,1, 10000=4,1 (USD)", RoHS=Compliant, Stock=2676, Supplier=Mouser

## Via types
v1: diameter 0.6, hole 0.3, Top Layer to Bottom Layer, tented both sides, 715 vias
v2: diameter 0.5, hole 0.3, Top Layer to Bottom Layer, tented both sides, 46 vias
v3: diameter 0.6, hole 0.4, Top Layer to Bottom Layer, tented both sides, 42 vias
v4: diameter 0.5, hole 0.3, Top Layer to Bottom Layer, tented bottom, 12 vias

## Nets (pads, with @x,y where several pads share a name; then routed paths per layer and width w, separated by ;. In a path a pad name is that pad's centre, name@x,y a point inside that pad or via, vN(x,y) a via of type N, cw(c..) or ccw(c..) an arc to the next point about the centre after c; other vN are vias at no path point)
GND: C1.1 C2.1 C3.1 C4.2 C5.1 C6.1 C7.1 C8.1 C9.1 C10.1 C12.2 C13.1 C14.1 C15.1 C16.1 C18.1 C20.1 D1.A J1.1 J2.2 Q2.2 Q2.4 Q2.6 Q2.8 Q4.S R4.1 R6.1 R10.1 R11.1 R16.1 TP2.1 TP4.1 U1.5 U1.26 U1.27 U1.29 | length 1.9
  Top Layer w0.5: C3.1 C1.1